# Altium PCB Small_DDS_Breakout.PcbDoc
Units mil, origin at the board's own origin, x right, y up, seen from the top; angles counter-clockwise.
Board outline 850 x 730 mil, 2 copper layers (Top Layer, Bottom Layer); 6 components, 59 nets, 25 pads, 5 vias.
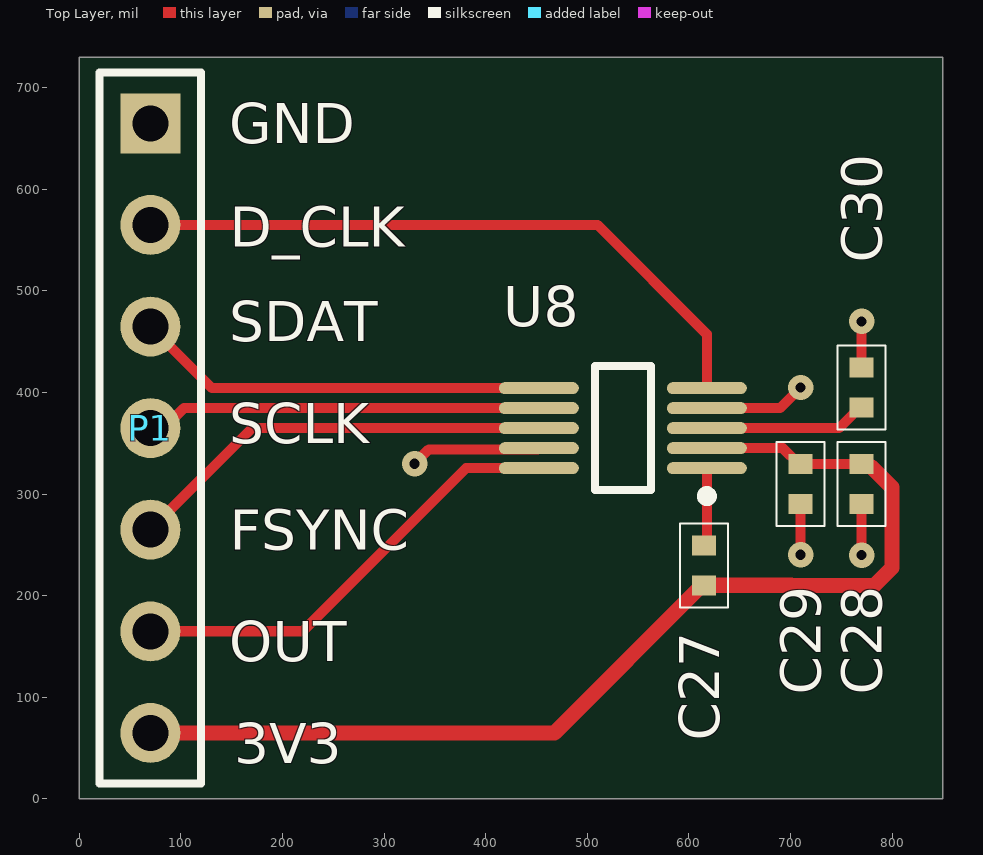
[diagram p0: Top Layer view]
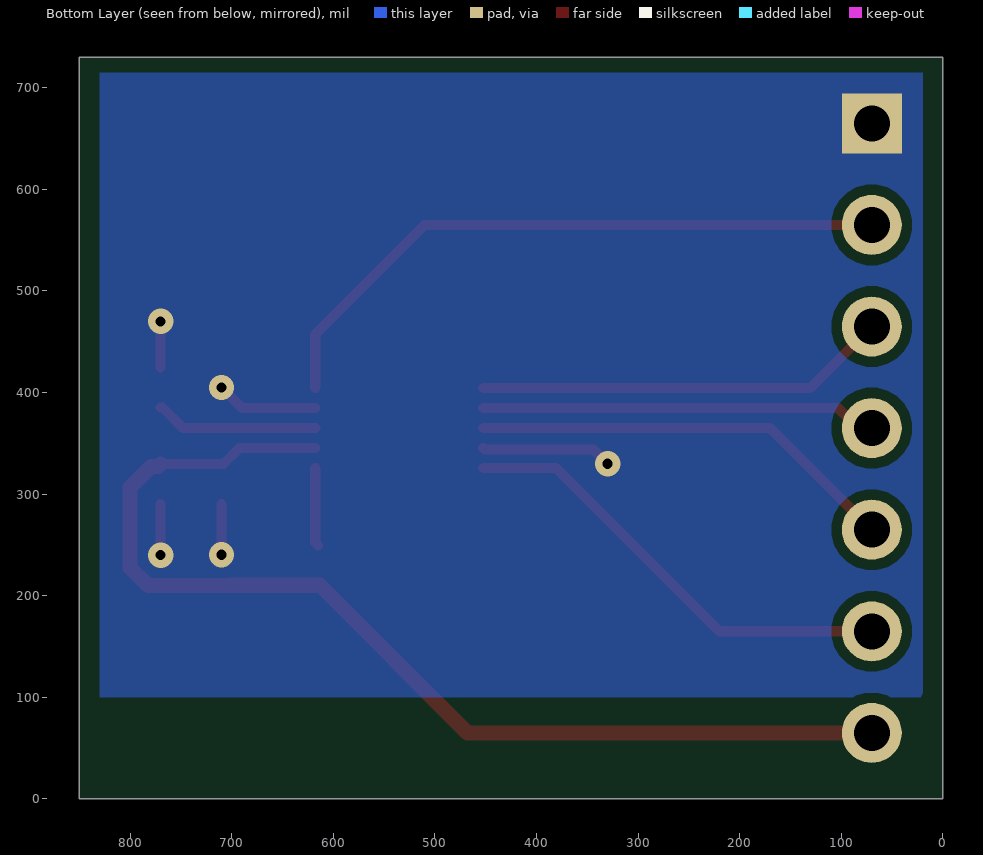
[diagram p1: Bottom Layer view, seen from below]

## Layer stack, top to bottom
Top Solder: solder mask 0.4, Solder Resist, Dk 3.5
Top Layer: signal copper 1.4
Dielectric 1: dielectric 12.6, FR-4, Dk 4.8
Bottom Layer: signal copper 1.4
Bottom Solder: solder mask 0.4, Solder Resist, Dk 3.5

## Board outline
0,0 0,730 850,730 850,0

## Design rules (kind name [scope] priority, off if disabled: settings)
Clearance [All] p1: gap=10 ignorepadtopadclearanceinfootprint=TRUE except(0: Arc-Hole Track-Hole SMDPad-Hole THPad-Hole Via-Hole Fill-Hole Poly-Hole Region-Hole Text-Hole; 5: Arc-Arc Arc-Track Track-Track)
PlaneConnect [All] p1: planeconnectstyle=Direct reliefexpansion=20 reliefentries=4 reliefconductorwidth=10 reliefairgap=10
PolygonConnect [All] p1: connectstyle=Direct reliefconductorwidth=10 reliefentries=4 polygonreliefangle="90 Angle" airgapwidth=10
RoutingVias [All] p1: holewidth=10 width=25 viastyle="Through Hole" minholewidth=10 minwidth=25 maxholewidth=28 maxwidth=50
SolderMaskExpansion [All] p1: expansion=4 istentingtop=FALSE
Width [All] p1: maxlimit=30 minlimit=10 preferedwidth=10 minimp=50.000000 maximp=50.000000 favimp=50.000000
29 further rules are at their usual default settings.

## Classes and differential pairs
channel class PGA_Block: U_PGA_Block1 U_PGA_Block2 U_PGA_Block3 U_PGA_Block4
channel class Current_Measure: U_Current_Measure1 U_Current_Measure2 U_Current_Measure3 U_Current_Measure4
net class Wave_In[3..0]: Wave_In0 Wave_In1 Wave_In2 Wave_In3
net class TF_LOW[4..1]: TF_LOW1 TF_LOW2 TF_LOW3 TF_LOW4
net class FROM_BRAIN[4..1]: FROM_BRAIN1 FROM_BRAIN2 FROM_BRAIN3 FROM_BRAIN4
net class CH_AMP[3..0]: CH_AMP0 CH_AMP1 CH_AMP2 CH_AMP3
net class ADC_DATA[4..1]: ADC_DATA1 ADC_DATA2 ADC_DATA3 ADC_DATA4
net class \P\G\A\_\C\S\[3..0]: \P\G\A\_\C\S\0 \P\G\A\_\C\S\1 \P\G\A\_\C\S\2 \P\G\A\_\C\S\3

## Components (designator, comment, footprint, x,y, rotation, side; value= is the part's Value field where it differs from the comment)
C27 "Cap" 0402_Res 615,230 r270 top value=10u
C28 "Cap" 0402_Res 770,310 r90 top value=0.1u
C29 "Cap" 0402_Res 710,310 r90 top value=10u
C30 "Cap" 0402_Res 770,405 r270 top value=0.1u
P1 "Header 7" HDR1X7 70,665 r270 top
U8 "AD9833BRMZ" ADI-RM-10_M 535,365 r180 top

## Footprints (in the part's own frame and the unit in brackets; to place one, negate y for a bottom-side part, rotate by r counter-clockwise, add the part's x,y. Pads: shape width x height; smd on the part's side, far side on the other; paste and mask are expansions set on the pad)
0402_Res [mm]
  rect 0.5x0.6 smd: 1(-0.5,0) 2(0.5,0)
  silkscreen extent -1.05,-0.6 1.05,0.6
ADI-RM-10_M [mm] "TSSOP, 10-Leads, Body 3x3mm, Pitch 0.5mm, IPC Low Density"
  oval 2x0.3 smd: 1(-2.1,1) 2(-2.1,0.5) 3(-2.1,0) 4(-2.1,-0.5) 5(-2.1,-1) 6(2.1,-1) 7(2.1,-0.5) 8(2.1,0) 9(2.1,0.5) 10(2.1,1)
  silkscreen extent -2.22,-1.55 0.7,1.82, body extent -1.55,-1.55 1.55,1.55, height 1.1
HDR1X7 [mm] "Connector; Header; 7 Position"
  rect 1.5x1.5 hole 0.9: 1(0,0)
  round 1.5 hole 0.9: 2(2.54,0) 3(5.08,0) 4(7.62,0) 5(10.16,0) 6(12.7,0) 7(15.24,0)
  silkscreen extent -1.27,-1.27 16.51,1.27

## Part data
C27 C28 C29 C30: "Capacitor", LatestRevisionDate=17-Jul-2002, LatestRevisionNote="Re-released for DXP Platform.", PackageDescription="Radial Cap, Thru-Hole; 2 Leads; 0.3 in Pin Spacing", PackageReference=RAD-0.3, Published=8-Jun-2000, Publisher="Altium Limited"
P1: "Header, 7-Pin", LatestRevisionDate=17-Jul-2002, LatestRevisionNote="Re-released for DXP Platform.", Publisher="Altium Limited"
U8: library part CMP-0293-00077-1, "Low Power, 12.65 mW, 2.3 V to 5.5 V, Programmable Waveform Generator, 10-Bit, Serial, RM-10, 50 Tube, Pb-Free", Code_JEDEC=MO-187-BA, Compliance Range (V)=650mV, ComponentLink1Description="Manufacturer URL", ComponentLink1URL=www.analog.com, ComponentLink2Description=Datasheet, ComponentLink2URL=http://www.analog.com/static/imported-files/data_sheets/AD9833.pdf, ComponentLink3Description="Package Specification", ComponentLink3URL=http://www.analog.com/static/imported-files/packages/PKG_PDF/MSOP%28RM%29/RM_10.pdf, DatasheetVersion="Rev. D", FS Iout (mA nom)=3mA, I Supply total (max)=5.5mA, I/O Interface=Serial, Master fclk=25MHz, PackageDescription="10-Lead Mini Small Outline Package [MSOP]", PackageReference=RM-10, PackageVersion=5/8/2005, REFCLK Multiplier=No, Resolution (Bits)=10bit, Tuning Word Width (bits)=28bit

## Via types
v1: diameter 25, hole 10, Top Layer to Bottom Layer, 5 vias

## Nets (pads, with @x,y where several pads share a name; then routed paths per layer and width w, separated by ;. In a path a pad name is that pad's centre, name@x,y a point inside that pad or via, vN(x,y) a via of type N, cw(c..) or ccw(c..) an arc to the next point about the centre after c; other vN are vias at no path point)
1V8: 
3V3: C27.2 C28.2 C29.2 P1.7 U8.2 | length 1075.1
  Top Layer w10: U8.2 692.4,345.31 708.03,329.69 C29.2 C28.2
  Top Layer w15: P1.7 467.72,65 613.03,210.31 C27.2 700.71,210.31 701.03,210 782.43,210 800,227.57 800,306.72 779.37,327.34 772.34,327.34 C28.2
3V3_A: 
5V: 
\C\S\: 
\P\G\A\_\C\S\: 
\V\_\I\S\O\_\E\N\: 
\X\T\A\L\: 
ADC_CLK: 
ADC_DATA: 
AGND: 
DDS_CLK: P1.2 U8.5 | length 645.2
  Top Layer w10: P1.2 510,565 617.68,457.32 U8.5
FROM_BRAIN: 
FSYNC: P1.5 U8.8 | length 423.7
  Top Layer w10: P1.5 170,365 U8.8
GND: C28.1 C29.1 C30.1 P1.1 U8.4 U8.9 | length 375
  Top Layer w10: v1(330,330) 344.09,344.09 451.1,344.09 U8.9 ; U8.4 689.68,384.69 v1(710,405) ; v1(710,240.31) C29.1 ; v1(770,240) C28.1 ; C30.1 v1(770,470)
I/O_UPDATE: 
NetC1_1: 
NetC27_1: C27.1 U8.1 | length 77.1
  Top Layer w10: C27.1 617.68,252.36 U8.1
NetC30_2: C30.2 U8.3 | length 160.7
  Top Layer w10: U8.3 747.72,365 768.03,385.31 C30.2
NetR2_1: 
NetR3_1: 
NetR4_2: 
NetR5_1: 
NetR6_2: 
NetU6_U_PGA_Block1_6: 
NetU6_U_PGA_Block1_7: 
OUT_V_0: 
OUT_V_1: 
OUT_V_2: 
OUT_V_3: 
P0: 
P1: 
P2: 
P3: 
SCLK: P1.4 U8.7 | length 390.5
  Top Layer w10: P1.4 83.27,365 102.96,384.69 U8.7
SDATA: P1.3 U8.6 | length 407.4
  Top Layer w10: P1.3 130.63,404.37 U8.6
SDIO_0: 
SDIO_1: 
SDIO_2: 
SDIO_3: 
SIN_OUT: P1.6 U8.10 | length 448.9
  Top Layer w10: P1.6 220,165 380.63,325.63 U8.10
STIM_0: 
STIM_1: 
STIM_2: 
STIM_3: 
SYNC_CLK: 
TF_LOW: 
TF_LOW1: 
TF_LOW2: 
TF_LOW3: 
TF_LOW4: 
VBAT: 
Wave_In: 
Wave_In0: 
Wave_In1: 
Wave_In2: 
Wave_In3: 
Wave_Out: 
XTAL: 

## Polygon pours and split planes (outlines as drawn)
GND on Bottom Layer "GND_L02_P000" (solid, remove dead copper, pour order 0): 20,715 830,715 830,100 15,100 20,105

## Silkscreen, mask and mechanical layers (free items; w line width, h text height)
Top Overlay:
  text "GND" at 147.52,645.32 h39.37
  text "D_CLK" at 148.17,543.6 h39.37
  text "SDAT" at 147.84,450.32 h39.37
  text "SCLK" at 147.84,350.32 h39.37
  text "FSYNC" at 148.17,245.32 h39.37
  text "OUT" at 147.52,135.32 h39.37
  text "3V3" at 152.52,35.32 h39.37
Mechanical 1:
  the board outline again, w10